# Altium PCB Quectel_BG77_PCB_Footprint_AD_V1.1.PcbDoc
Units mm, origin at the board's own origin, x right, y up, seen from the top; angles counter-clockwise.
Board outline 152.4 x 101.6 mm, 2 copper layers (Top, Bottom), stack 0.323 mm thick; 1 components, 0 nets, 94 pads, 0 vias.
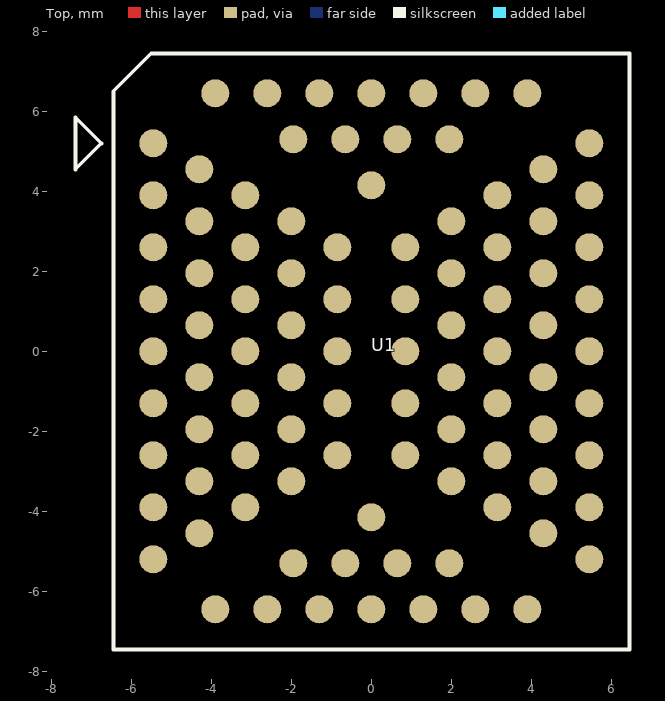
[diagram p0: Top view]
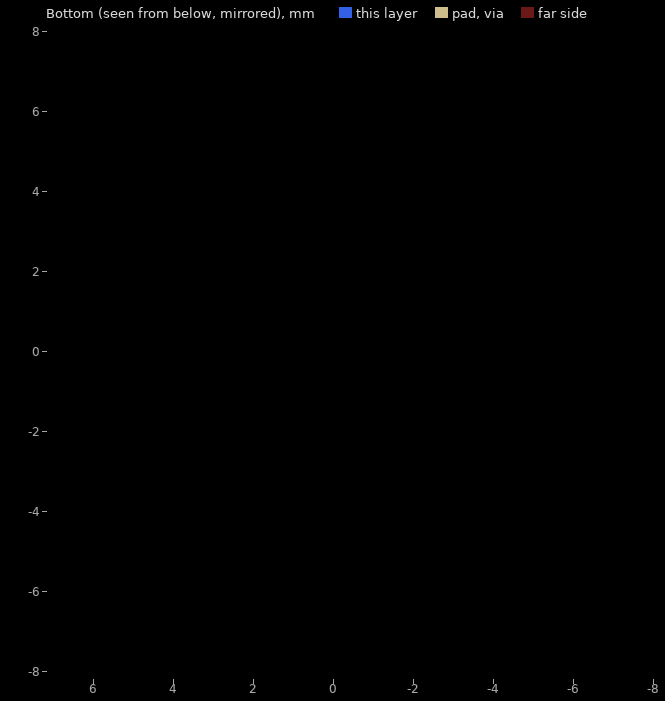
[diagram p1: Bottom view, seen from below]

## Layer stack, top to bottom
Top: signal copper 0.0343
Dielectric: dielectric 0.254, FR-4, Dk 4.3
Bottom: signal copper 0.0343

## Board outline
-228.6,-228.6 -76.2,-228.6 -76.2,-127 -228.6,-127

## Design rules (kind name [scope] priority, off if disabled: settings)
Clearance "'Default' PADS rule_18" [All] p1: gap=0.152
Clearance "'Default' PADS rule_15" [IsVia vs IsVia] p2: gap=0.152
ComponentClearance "'Default' PADS rule_12" [All] p1: gap=0.152 collisioncheckmode=3 verticalgap=0.254 showdistances=FALSE
FlightTimeFalling "'Default' PADS rule_10" [All] p1: maximum=10.00
FlightTimeRising "'Default' PADS rule_9" [All] p1: maximum=10.00
Length "'Default' PADS rule_5" [All] p1: maxlimit=1270 minlimit=0
MatchedLengths "'Default' PADS rule_11" [InNetClass('All Nets')] p1: tolerance=5.08 checknetsindiffpair=TRUE checkdiffpairvsdiffpair=TRUE checkothers=TRUE
MaxMinImpedance "'Default' PADS rule_8" [All] p1: minimum=50.00 maximum=150.0
ParallelSegment "'Default' PADS rule_7" [All] p1: limit=25.4 gap=5.08
ParallelSegment "'Default' PADS rule_6" [All] p2: limit=25.4 gap=5.08
PlaneClearance "'Default' PADS rule_14" [All] p1: clearance=0.152
PlaneConnect "Power Plane Connect Style - Via from round thru-hole global defaults" [IsVia] p1: planeconnectstyle=Relief reliefexpansion=0.508 reliefentries=4 reliefconductorwidth=0.381 reliefairgap=0.254
PlaneConnect "Power Plane Connect Style - Round thru-hole pad from global defaults" [IsPad And OnMultiLayer And (PadShape_MidLayer1 = 'Round') And (PadXSize_MidLayer1 = PadYSize_MidLayer1)] p2: planeconnectstyle=Relief reliefexpansion=0.508 reliefentries=4 reliefconductorwidth=0.381 reliefairgap=0.254
PlaneConnect "Power Plane Connect Style - Square thru-hole pad from global defaults" [IsPad And OnMultiLayer And ((PadShape_MidLayer1 = 'Rectangular') Or (PadShape_MidLayer1 = 'Octagonal') Or (PadShape_MidLayer1 = 'Rounded Rectangle')) And (PadXSize_MidLayer1 = PadYSize_MidLayer1)] p3: planeconnectstyle=Relief reliefexpansion=0.508 reliefentries=4 reliefconductorwidth=0.381 reliefairgap=0.254
PlaneConnect "Power Plane Connect Style - Rect thru-hole pad from global defaults" [IsPad And OnMultiLayer And ((PadShape_MidLayer1 = 'Rectangular') Or (PadShape_MidLayer1 = 'Octagonal') Or (PadShape_MidLayer1 = 'Rounded Rectangle')) And (PadXSize_MidLayer1 <> PadYSize_MidLayer1)] p4: planeconnectstyle=Relief reliefexpansion=0.508 reliefentries=4 reliefconductorwidth=0.381 reliefairgap=0.254
PlaneConnect "Power Plane Connect Style - Square-rect thru-hole pad from global defaults" [IsPad And OnMultiLayer And (PadShape_MidLayer1 = 'Rounded Rectangle') And (PadXSize_MidLayer1 = PadYSize_MidLayer1) And (Pad_CornerRadius_MidLayer1 = '0%')] p5: planeconnectstyle=Relief reliefexpansion=0.508 reliefentries=4 reliefconductorwidth=0.381 reliefairgap=0.254
PlaneConnect "Power Plane Connect Style - Oval thru-hole pad from global defaults" [IsPad And OnMultiLayer And (PadShape_MidLayer1 = 'Round') And (PadXSize_MidLayer1 <> PadYSize_MidLayer1)] p6: planeconnectstyle=Relief reliefexpansion=0.508 reliefentries=4 reliefconductorwidth=0.381 reliefairgap=0.254
PlaneConnect "Power Plane Connect Style - Round-oval thru-hole pad from global defaults" [IsPad And OnMultiLayer And (PadShape_MidLayer1 = 'Rounded Rectangle') And (PadXSize_MidLayer1 = PadYSize_MidLayer1) And (Pad_CornerRadius_MidLayer1 = '100%')] p7: planeconnectstyle=Relief reliefexpansion=0.508 reliefentries=4 reliefconductorwidth=0.381 reliefairgap=0.254
PolygonConnect "Polygon Connect Style - Bottom Round SMD from global defaults" [IsSMTPin And (PadShape_BottomLayer = 'Round') And (PadXSize_BottomLayer = PADYSize_BottomLayer) vs Layer = 'Bottom'] p1: connectstyle=Relief reliefconductorwidth=0.254 reliefentries=4 polygonreliefangle="45 Angle" airgapwidth=0.254
PolygonConnect "Polygon Connect Style - Top Round SMD from global defaults" [IsSMTPin And (PadShape_TopLayer = 'Round') And (PadXSize_TopLayer = PADYSize_TopLayer) vs Layer = 'Top'] p2: connectstyle=Relief reliefconductorwidth=0.254 reliefentries=4 polygonreliefangle="45 Angle" airgapwidth=0.254
PolygonConnect "Polygon Connect Style - Bottom Square SMD from global defaults 1" [IsSMTPin And (PadShape_BottomLayer = 'Rectangular') And (PadXSize_BottomLayer = PADYSize_BottomLayer) vs Layer = 'Bottom'] p3: connectstyle=Relief reliefconductorwidth=0.254 reliefentries=4 polygonreliefangle="45 Angle" airgapwidth=0.254
PolygonConnect "Polygon Connect Style - Bottom Square SMD from global defaults 2" [IsSMTPin And (PadShape_BottomLayer = 'Octagonal') And (PadXSize_BottomLayer = PADYSize_BottomLayer) vs Layer = 'Bottom'] p4: connectstyle=Relief reliefconductorwidth=0.254 reliefentries=4 polygonreliefangle="45 Angle" airgapwidth=0.254
PolygonConnect "Polygon Connect Style - Bottom Square SMD from global defaults 3" [IsSMTPin And (PadShape_BottomLayer = 'Rounded Rectangle') And (PadXSize_BottomLayer = PADYSize_BottomLayer) vs Layer = 'Bottom'] p5: connectstyle=Relief reliefconductorwidth=0.254 reliefentries=4 polygonreliefangle="45 Angle" airgapwidth=0.254
PolygonConnect "Polygon Connect Style - Top Square SMD from global defaults 1" [IsSMTPin And (PadShape_TopLayer = 'Rectangular') And (PadXSize_TopLayer = PADYSize_TopLayer) vs Layer = 'Top'] p6: connectstyle=Relief reliefconductorwidth=0.254 reliefentries=4 polygonreliefangle="45 Angle" airgapwidth=0.254
PolygonConnect "Polygon Connect Style - Top Square SMD from global defaults 2" [IsSMTPin And (PadShape_TopLayer = 'Octagonal') And (PadXSize_TopLayer = PADYSize_TopLayer) vs Layer = 'Top'] p7: connectstyle=Relief reliefconductorwidth=0.254 reliefentries=4 polygonreliefangle="45 Angle" airgapwidth=0.254
PolygonConnect "Polygon Connect Style - Top Square SMD from global defaults 3" [IsSMTPin And (PadShape_TopLayer = 'Rounded Rectangle') And (PadXSize_TopLayer = PADYSize_TopLayer) vs Layer = 'Top'] p8: connectstyle=Relief reliefconductorwidth=0.254 reliefentries=4 polygonreliefangle="45 Angle" airgapwidth=0.254
PolygonConnect "Polygon Connect Style - Bottom Rect SMD from global defaults 1" [IsSMTPin And (PadShape_BottomLayer = 'Rectangular') And (PadXSize_BottomLayer <> PADYSize_BottomLayer) vs Layer = 'Bottom'] p9: connectstyle=Relief reliefconductorwidth=0.254 reliefentries=4 polygonreliefangle="45 Angle" airgapwidth=0.254
PolygonConnect "Polygon Connect Style - Bottom Rect SMD from global defaults 2" [IsSMTPin And (PadShape_BottomLayer = 'Octagonal') And (PadXSize_BottomLayer <> PADYSize_BottomLayer) vs Layer = 'Bottom'] p10: connectstyle=Relief reliefconductorwidth=0.254 reliefentries=4 polygonreliefangle="45 Angle" airgapwidth=0.254
PolygonConnect "Polygon Connect Style - Bottom Rect SMD from global defaults 3" [IsSMTPin And (PadShape_BottomLayer = 'Rounded Rectangle') And (PadXSize_BottomLayer <> PADYSize_BottomLayer) vs Layer = 'Bottom'] p11: connectstyle=Relief reliefconductorwidth=0.254 reliefentries=4 polygonreliefangle="45 Angle" airgapwidth=0.254
PolygonConnect "Polygon Connect Style - Bottom Square-rect SMD pad from global defaults" [IsSMTPin And (PadShape_BottomLayer = 'Rounded Rectangle') And (PadXSize_BottomLayer = PADYSize_BottomLayer) And (Pad_CornerRadius_BottomLayer = '0%') vs Layer = 'Bottom'] p12: connectstyle=Relief reliefconductorwidth=0.254 reliefentries=4 polygonreliefangle="45 Angle" airgapwidth=0.254
PolygonConnect "Polygon Connect Style - Top Rect SMD from global defaults 1" [IsSMTPin And (PadShape_TopLayer = 'Rectangular') And (PadXSize_TopLayer <> PADYSize_TopLayer) vs Layer = 'Top'] p13: connectstyle=Relief reliefconductorwidth=0.254 reliefentries=4 polygonreliefangle="45 Angle" airgapwidth=0.254
PolygonConnect "Polygon Connect Style - Top Rect SMD from global defaults 2" [IsSMTPin And (PadShape_TopLayer = 'Octagonal') And (PadXSize_TopLayer <> PADYSize_TopLayer) vs Layer = 'Top'] p14: connectstyle=Relief reliefconductorwidth=0.254 reliefentries=4 polygonreliefangle="45 Angle" airgapwidth=0.254
PolygonConnect "Polygon Connect Style - Top Rect SMD from global defaults 3" [IsSMTPin And (PadShape_TopLayer = 'Rounded Rectangle') And (PadXSize_TopLayer <> PADYSize_TopLayer) vs Layer = 'Top'] p15: connectstyle=Relief reliefconductorwidth=0.254 reliefentries=4 polygonreliefangle="45 Angle" airgapwidth=0.254
PolygonConnect "Polygon Connect Style - Top Square-rect SMD pad from global defaults" [IsSMTPin And (PadShape_TopLayer = 'Rounded Rectangle') And (PadXSize_TopLayer = PADYSize_TopLayer) And (Pad_CornerRadius_TopLayer = '0%') vs Layer = 'Top'] p16: connectstyle=Relief reliefconductorwidth=0.254 reliefentries=4 polygonreliefangle="45 Angle" airgapwidth=0.254
PolygonConnect "Polygon Connect Style - Bottom Oval SMD from global defaults" [IsSMTPin And (PadShape_BottomLayer = 'Round') And (PadXSize_BottomLayer <> PADYSize_BottomLayer) vs Layer = 'Bottom'] p17: connectstyle=Relief reliefconductorwidth=0.254 reliefentries=4 polygonreliefangle="45 Angle" airgapwidth=0.254
PolygonConnect "Polygon Connect Style - Bottom Round-oval SMD pad from global defaults" [IsSMTPin And (PadShape_BottomLayer = 'Rounded Rectangle') And (PadXSize_BottomLayer = PADYSize_BottomLayer) And (Pad_CornerRadius_BottomLayer = '100%') vs Layer = 'Bottom'] p18: connectstyle=Relief reliefconductorwidth=0.254 reliefentries=4 polygonreliefangle="45 Angle" airgapwidth=0.254
PolygonConnect "Polygon Connect Style - Top Oval SMD from global defaults" [IsSMTPin And (PadShape_TopLayer = 'Round') And (PadXSize_TopLayer <> PADYSize_TopLayer) vs Layer = 'Top'] p19: connectstyle=Relief reliefconductorwidth=0.254 reliefentries=4 polygonreliefangle="45 Angle" airgapwidth=0.254
PolygonConnect "Polygon Connect Style - Top Round-oval SMD pad from global defaults" [IsSMTPin And (PadShape_TopLayer = 'Rounded Rectangle') And (PadXSize_TopLayer = PADYSize_TopLayer) And (Pad_CornerRadius_TopLayer = '100%') vs Layer = 'Top'] p20: connectstyle=Relief reliefconductorwidth=0.254 reliefentries=4 polygonreliefangle="45 Angle" airgapwidth=0.254
PolygonConnect "Polygon Connect Style - Via from round thru-hole global defaults_19" [IsVia] p21: connectstyle=Relief reliefconductorwidth=0.381 reliefentries=4 polygonreliefangle="45 Angle" airgapwidth=0.254
PolygonConnect "Polygon Connect Style - Bottom Round thru-hole pad from global defaults" [IsPad And OnMultiLayer And (PadShape_BottomLayer = 'Round') And (PadXSize_BottomLayer = PADYSize_BottomLayer) vs Layer = 'Bottom'] p22: connectstyle=Relief reliefconductorwidth=0.381 reliefentries=4 polygonreliefangle="45 Angle" airgapwidth=0.254
PolygonConnect "Polygon Connect Style - Via from round thru-hole global defaults" [IsVia] p23: connectstyle=Relief reliefconductorwidth=0.381 reliefentries=4 polygonreliefangle="45 Angle" airgapwidth=0.254
PolygonConnect "Polygon Connect Style - Top Round thru-hole pad from global defaults" [IsPad And OnMultiLayer And (PadShape_TopLayer = 'Round') And (PadXSize_TopLayer = PADYSize_TopLayer) vs Layer = 'Top'] p24: connectstyle=Relief reliefconductorwidth=0.381 reliefentries=4 polygonreliefangle="45 Angle" airgapwidth=0.254
PolygonConnect "Polygon Connect Style - Bottom Square thru-hole pad from global defaults" [IsPad And OnMultiLayer And ((PadShape_BottomLayer = 'Rectangular') Or (PadShape_BottomLayer = 'Octagonal') Or (PadShape_BottomLayer = 'Rounded Rectangle')) And (PadXSize_BottomLayer = PADYSize_BottomLayer) vs Layer = 'Bottom'] p25: connectstyle=Relief reliefconductorwidth=0.381 reliefentries=4 polygonreliefangle="45 Angle" airgapwidth=0.254
PolygonConnect "Polygon Connect Style - Top Square thru-hole pad from global defaults" [IsPad And OnMultiLayer And ((PadShape_TopLayer = 'Rectangular') Or (PadShape_TopLayer = 'Octagonal') Or (PadShape_TopLayer = 'Rounded Rectangle')) And (PadXSize_TopLayer = PADYSize_TopLayer) vs Layer = 'Top'] p26: connectstyle=Relief reliefconductorwidth=0.381 reliefentries=4 polygonreliefangle="45 Angle" airgapwidth=0.254
PolygonConnect "Polygon Connect Style - Bottom Rect thru-hole pad from global defaults" [IsPad And OnMultiLayer And ((PadShape_BottomLayer = 'Rectangular') Or (PadShape_BottomLayer = 'Octagonal') Or (PadShape_BottomLayer = 'Rounded Rectangle')) And (PadXSize_BottomLayer <> PADYSize_BottomLayer) vs Layer = 'Bottom'] p27: connectstyle=Relief reliefconductorwidth=0.381 reliefentries=4 polygonreliefangle="45 Angle" airgapwidth=0.254
PolygonConnect "Polygon Connect Style - Bottom Square-rect thru-hole pad from global defaults" [IsPad And OnMultiLayer And (PadShape_BottomLayer = 'Rounded Rectangle') And (PadXSize_BottomLayer = PADYSize_BottomLayer) And (Pad_CornerRadius_BottomLayer = '0%') vs Layer = 'Bottom'] p28: connectstyle=Relief reliefconductorwidth=0.381 reliefentries=4 polygonreliefangle="45 Angle" airgapwidth=0.254
PolygonConnect "Polygon Connect Style - Top Rect thru-hole pad from global defaults" [IsPad And OnMultiLayer And ((PadShape_TopLayer = 'Rectangular') Or (PadShape_TopLayer = 'Octagonal') Or (PadShape_TopLayer = 'Rounded Rectangle')) And (PadXSize_TopLayer <> PADYSize_TopLayer) vs Layer = 'Top'] p29: connectstyle=Relief reliefconductorwidth=0.381 reliefentries=4 polygonreliefangle="45 Angle" airgapwidth=0.254
PolygonConnect "Polygon Connect Style - Top Square-rect thru-hole pad from global defaults" [IsPad And OnMultiLayer And (PadShape_TopLayer = 'Rounded Rectangle') And (PadXSize_TopLayer = PADYSize_TopLayer) And (Pad_CornerRadius_TopLayer = '0%') vs Layer = 'Top'] p30: connectstyle=Relief reliefconductorwidth=0.381 reliefentries=4 polygonreliefangle="45 Angle" airgapwidth=0.254
PolygonConnect "Polygon Connect Style - Bottom Oval thru-hole pad from global defaults" [IsPad And OnMultiLayer And (PadShape_BottomLayer = 'Round') And (PadXSize_BottomLayer <> PADYSize_BottomLayer) vs Layer = 'Bottom'] p31: connectstyle=Relief reliefconductorwidth=0.381 reliefentries=4 polygonreliefangle="45 Angle" airgapwidth=0.254
PolygonConnect "Polygon Connect Style - Bottom Round-oval thru-hole pad from global defaults" [IsPad And OnMultiLayer And (PadShape_BottomLayer = 'Rounded Rectangle') And (PadXSize_BottomLayer = PADYSize_BottomLayer) And (Pad_CornerRadius_BottomLayer = '100%') vs Layer = 'Bottom'] p32: connectstyle=Relief reliefconductorwidth=0.381 reliefentries=4 polygonreliefangle="45 Angle" airgapwidth=0.254
PolygonConnect "Polygon Connect Style - Top Oval thru-hole pad from global defaults" [IsPad And OnMultiLayer And (PadShape_TopLayer = 'Round') And (PadXSize_TopLayer <> PADYSize_TopLayer) vs Layer = 'Top'] p33: connectstyle=Relief reliefconductorwidth=0.381 reliefentries=4 polygonreliefangle="45 Angle" airgapwidth=0.254
PolygonConnect "Polygon Connect Style - Top Round-oval thru-hole pad from global defaults" [IsPad And OnMultiLayer And (PadShape_TopLayer = 'Rounded Rectangle') And (PadXSize_TopLayer = PADYSize_TopLayer) And (Pad_CornerRadius_TopLayer = '100%') vs Layer = 'Top'] p34: connectstyle=Relief reliefconductorwidth=0.381 reliefentries=4 polygonreliefangle="45 Angle" airgapwidth=0.254
PolygonConnect [All] p35: connectstyle=Relief reliefconductorwidth=0.254 reliefentries=4 polygonreliefangle="90 Angle" airgapwidth=0.254
RoutingLayers "'Default' PADS rule_3" [All] p1: top layer_v5=TRUE bottom layer_v5=TRUE
RoutingPriority "'Default' PADS rule_2" [All] p1: routingpriority=3
RoutingTopology "'Default' PADS rule" [All] p1: topology=Shortest
RoutingVias "'Default' PADS rule_4" [All] p1: holewidth=0.94 width=1.397 viastyle="Through Hole" minholewidth=0.94 minwidth=1.397 maxholewidth=0.94 maxwidth=1.397
SMDToCorner "'Default' PADS rule_16" [All] p1: distance=60000
SMDToPlane "'Default' PADS rule_17" [All] p1: distance=60000
SolderMaskExpansion [All] p1: expansion=0.102
Width "'Default' PADS rule_13" [All] p1: maxlimit=0.305 minlimit=0.305 preferedwidth=0.305
22 further rules are at their usual default settings.

## Components (designator, comment, footprint, x,y, rotation, side; value= is the part's Value field where it differs from the comment)
U1 "BG77" BG77 0,0 r0 top

## Footprints (in the part's own frame and the unit in brackets; to place one, negate y for a bottom-side part, rotate by r counter-clockwise, add the part's x,y. Pads: shape width x height; smd on the part's side, far side on the other; paste and mask are expansions set on the pad)
BG77 [mm]
  round 0.7 smd mask+0.05: 1(-5.45,5.2) 2(-5.45,3.9) 3(-5.45,2.6) 4(-5.45,1.3) 5(-5.45,0) 6(-5.45,-1.3) 7(-5.45,-2.6) 8(-5.45,-3.9) 9(-5.45,-5.2) 10(-3.9,-6.45) 11(-2.6,-6.45) 12(-1.3,-6.45) 13(0,-6.45) 14(1.3,-6.45) 15(2.6,-6.45) 16(3.9,-6.45) 17(5.45,-5.2) 18(5.45,-3.9) 19(5.45,-2.6) 20(5.45,-1.3) 21(5.45,0) 22(5.45,1.3) 23(5.45,2.6) 24(5.45,3.9) 25(5.45,5.2) 26(3.9,6.45) 27(2.6,6.45) 28(1.3,6.45) 29(0,6.45) 30(-1.3,6.45) 31(-2.6,6.45) 32(-3.9,6.45) 33(-4.3,4.55) 34(-4.3,3.25) 35(-4.3,1.95) 36(-4.3,0.65) 37(-4.3,-0.65) 38(-4.3,-1.95) 39(-4.3,-3.25) 40(-4.3,-4.55) 41(-1.95,-5.3) 42(-0.65,-5.3) 43(0.65,-5.3) 44(1.95,-5.3) 45(4.3,-4.55) 46(4.3,-3.25) 47(4.3,-1.95) 48(4.3,-0.65) 49(4.3,0.65) 50(4.3,1.95) 51(4.3,3.25) 52(4.3,4.55) 53(1.95,5.3) 54(0.65,5.3) 55(-0.65,5.3) 56(-1.95,5.3) 57(-3.15,3.9) 58(-3.15,2.6) 59(-3.15,1.3) 60(-3.15,0) 61(-3.15,-1.3) 62(-3.15,-2.6) 63(-3.15,-3.9) 64(0,-4.15) 65(3.15,-3.9) 66(3.15,-2.6) 67(3.15,-1.3) 68(3.15,0) 69(3.15,1.3) 70(3.15,2.6) 71(3.15,3.9) 72(0,4.15) 73(-2,3.25) 74(-2,1.95) 75(-2,0.65) 76(-2,-0.65) 77(-2,-1.95) 78(-2,-3.25) 79(2,-3.25) 80(2,-1.95) 81(2,-0.65) 82(2,0.65) 83(2,1.95) 84(2,3.25) 85(-0.85,2.6) 86(-0.85,1.3) 87(-0.85,0) 88(-0.85,-1.3) 89(-0.85,-2.6) 90(0.85,-2.6) 91(0.85,-1.3) 92(0.85,0) 93(0.85,1.3) 94(0.85,2.6)
  silkscreen extent -7.4,-7.45 6.45,7.45

## Nets (pads, with @x,y where several pads share a name; then routed paths per layer and width w, separated by ;. In a path a pad name is that pad's centre, name@x,y a point inside that pad or via, vN(x,y) a via of type N, cw(c..) or ccw(c..) an arc to the next point about the centre after c; other vN are vias at no path point)
pads on no net: U1.1 U1.2 U1.3 U1.4 U1.5 U1.6 U1.7 U1.8 U1.9 U1.10 U1.11 U1.12 U1.13 U1.14 U1.15 U1.16 U1.17 U1.18 U1.19 U1.20 U1.21 U1.22 U1.23 U1.24 U1.25 U1.26 U1.27 U1.28 U1.29 U1.30 U1.31 U1.32 U1.33 U1.34 U1.35 U1.36 U1.37 U1.38 U1.39 U1.40 U1.41 U1.42 U1.43 U1.44 U1.45 U1.46 U1.47 U1.48 U1.49 U1.50 U1.51 U1.52 U1.53 U1.54 U1.55 U1.56 U1.57 U1.58 U1.59 U1.60 U1.61 U1.62 U1.63 U1.64 U1.65 U1.66 U1.67 U1.68 U1.69 U1.70 U1.71 U1.72 U1.73 U1.74 U1.75 U1.76 U1.77 U1.78 U1.79 U1.80 U1.81 U1.82 U1.83 U1.84 U1.85 U1.86 U1.87 U1.88 U1.89 U1.90 U1.91 U1.92 U1.93 U1.94